# Altium PCB 175-00025,rev1,Extended GPIO Apps Board.PcbDoc
Units mil, origin at the board's own origin, x right, y up, seen from the top; angles counter-clockwise.
Board outline 3307.09 x 1358.27 mil, 3 copper layers (Top Layer (*.GTL), Internal Plane 1 (*.GP1), Bottom Layer (GBL)); 13 components, 36 nets, 170 pads, 13 vias.
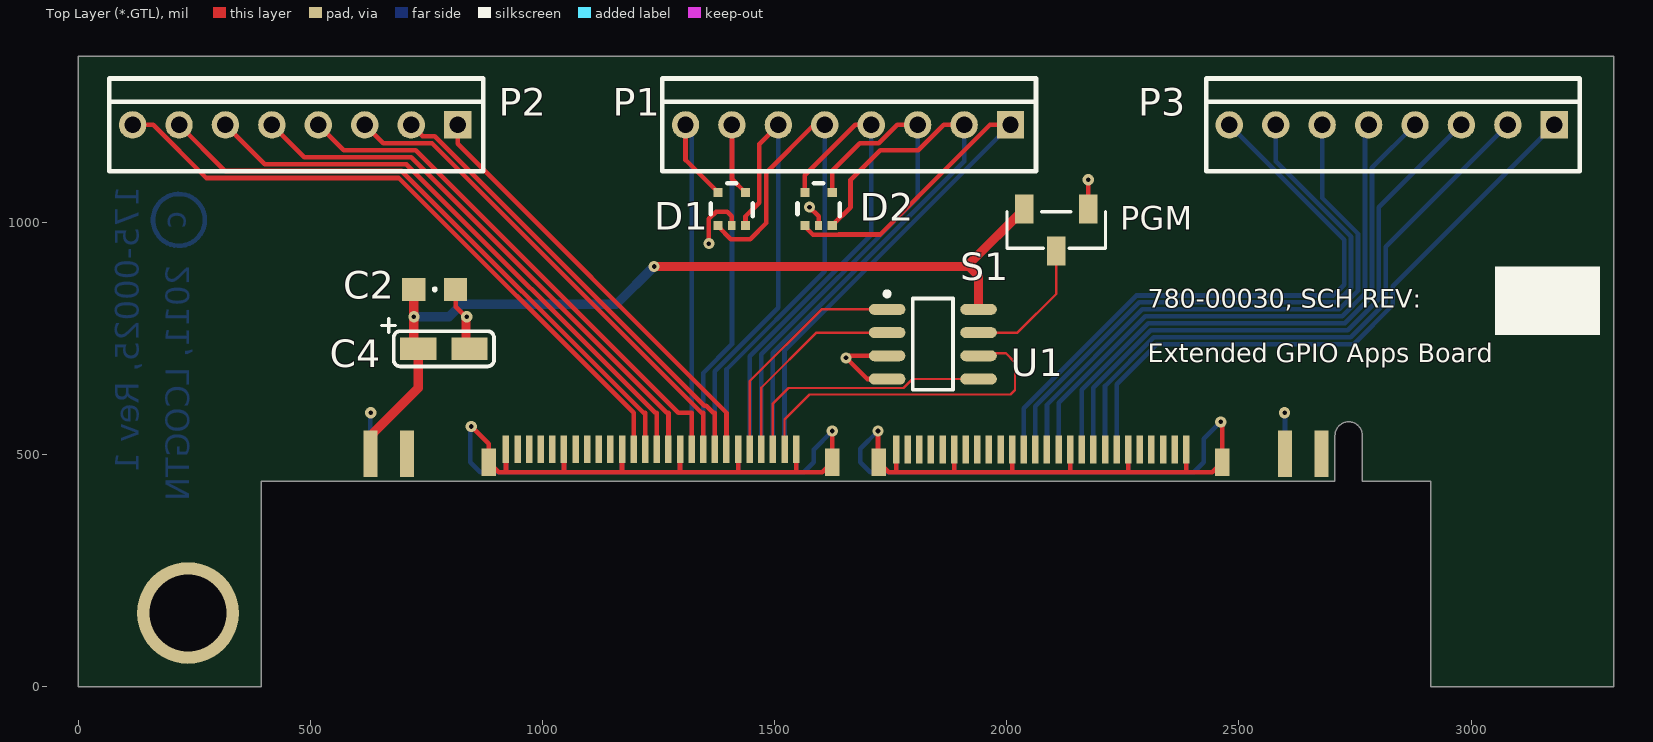
[diagram p0: Top Layer (*.GTL) view]
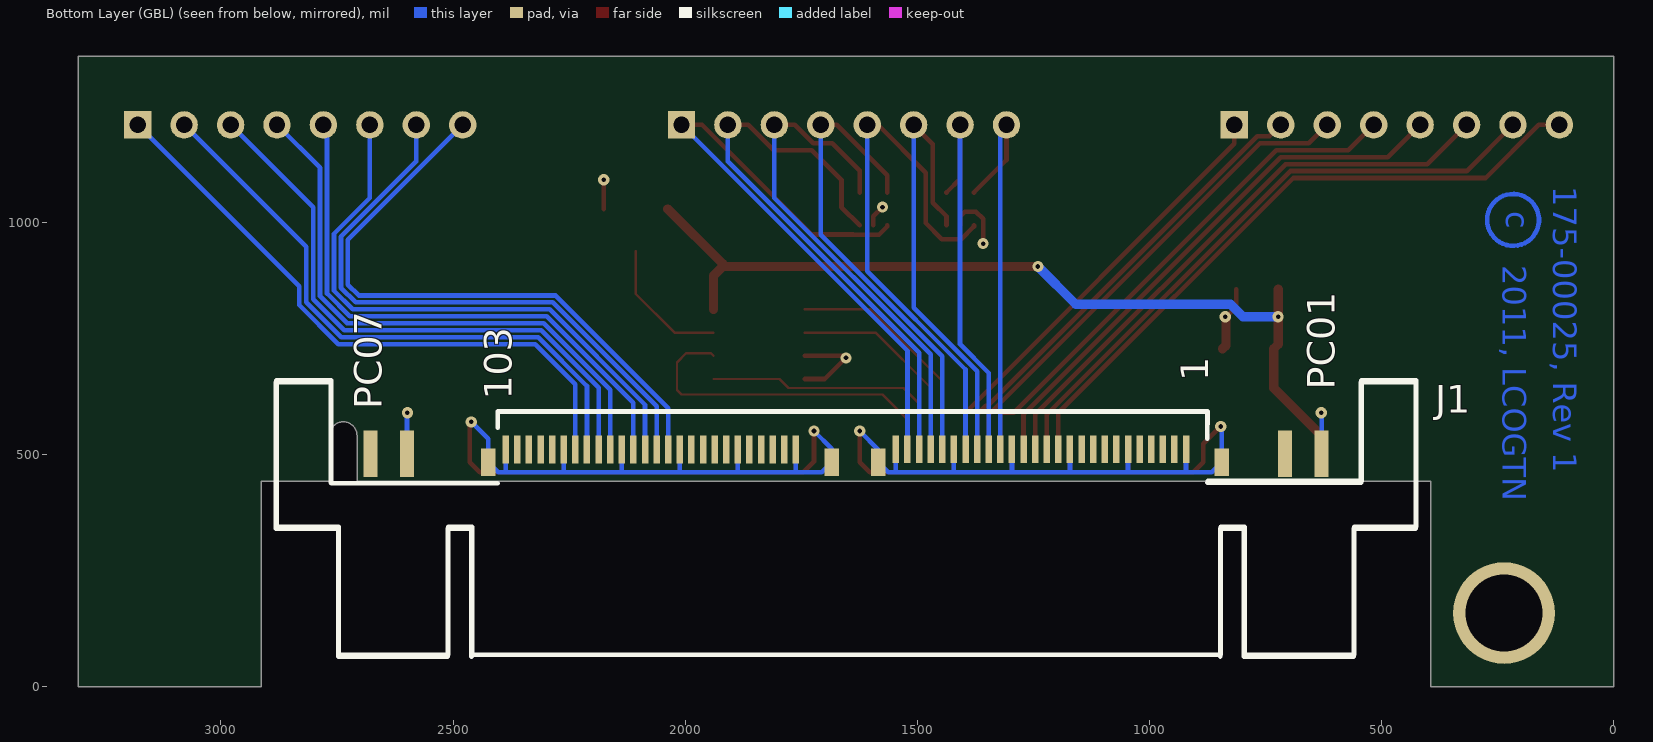
[diagram p1: Bottom Layer (GBL) view, seen from below]
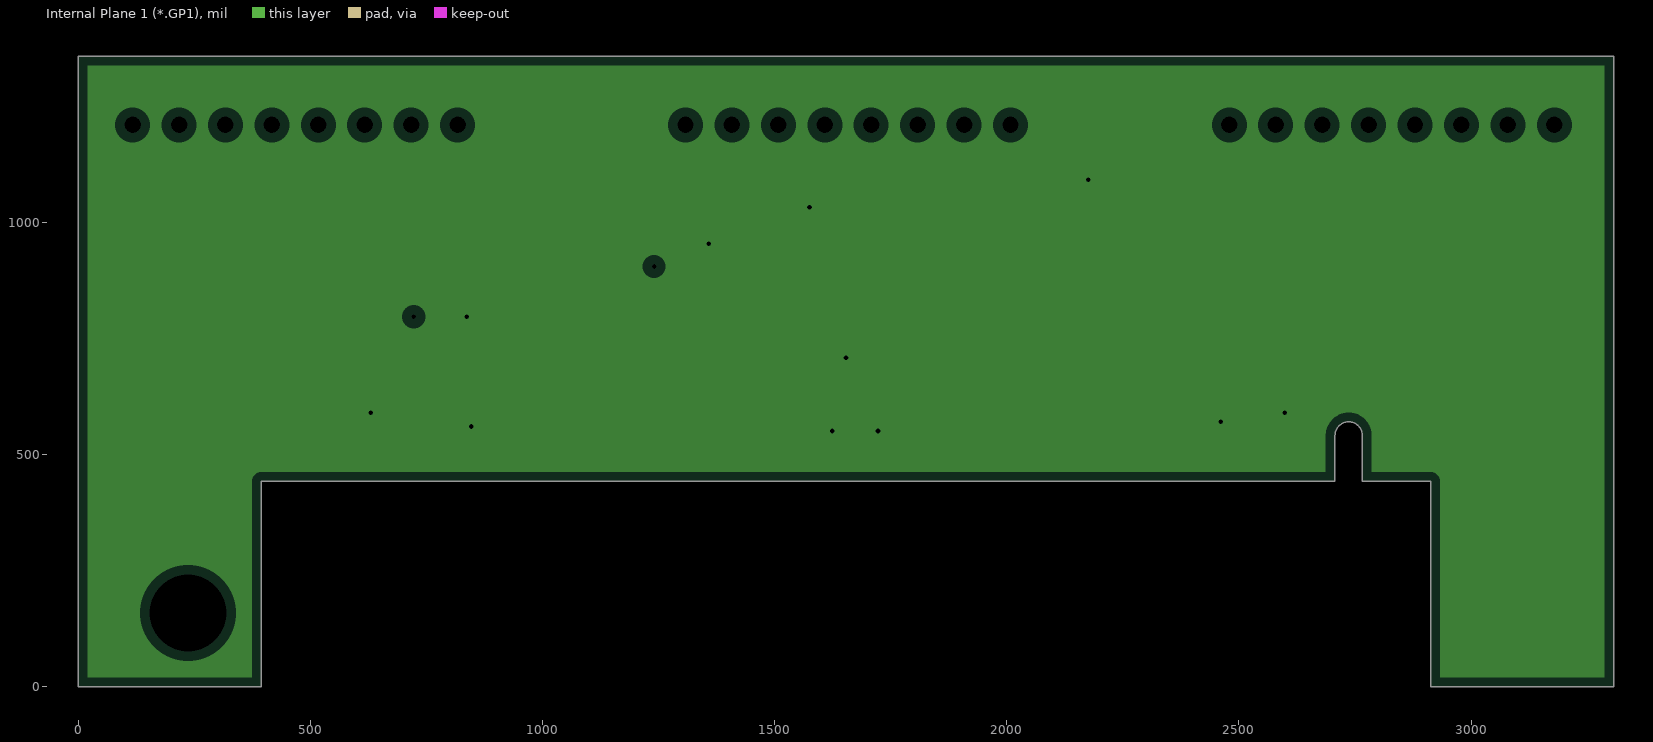
[diagram p2: Internal Plane 1 (*.GP1), clearances drawn from the general rule]

## Layer stack, top to bottom
Top Layer (*.GTL): signal copper 1.4
Dielectric: core 12.6, FR-4, Dk 4.8
Internal Plane 1 (*.GP1): plane copper 1.4, net GND
Dielectric: prepreg 12.6, FR-4, Dk 4.8
Bottom Layer (GBL): signal copper 1.4

## Board outline
0,0 0,442.91 0,1358.27 3307.09,1358.27 3307.09,0 2913.39,0 2913.39,442.91 2765.85,442.91 2765.85,541.34 ccw(c2736.32,541.34) 2706.79,541.34 2706.79,442.91 393.7,442.91 393.7,0

## Design rules (kind name [scope] priority, off if disabled: settings)
Clearance [All] p1: gap=5
ComponentClearance ComponentClearance_1 [(InComponent('J1'))] p1: gap=-393.7 collisioncheckmode=3 verticalgap=-393.7 showdistances=FALSE
ComponentClearance [All] p2: gap=10 collisioncheckmode=3 verticalgap=10 showdistances=FALSE
HoleSize [All] p1: absolutevalues=TRUE maxlimit=250 minlimit=1 maxpercent=80.000 minpercent=20.000
MinimumSolderMaskSliver [All] p1: minsoldermaskwidth=1
PlaneClearance [All] p1: clearance=20
PlaneConnect [All] p1: planeconnectstyle=Relief reliefexpansion=20 reliefentries=4 reliefconductorwidth=10 reliefairgap=10
PolygonConnect [All] p1: connectstyle=Relief reliefconductorwidth=10 reliefentries=4 polygonreliefangle="90 Angle"
RoomDefinition "780-00030,rev1,Pg1,Extended GPIO Apps board" [InComponentClass('780-00030,rev1,Pg1,Extended GPIO Apps board')] p1: confinementstyle=ConfineIn formatcopy=TRUE lockcomponents=FALSE outline -1304.13,-728.35 6606.3,-728.35 6606.3,2976.38 -1304.13,2976.38
RoutingVias [All] p1: holewidth=10 width=24 viastyle="Through Hole" minholewidth=10 minwidth=24 maxholewidth=28 maxwidth=50
SilkToSilkClearance [All] p1: silktosilkclearance=1
SilkscreenOverComponentPads [All] p1: minsilkscreentomaskgap=1
SolderMaskExpansion [All] p1: expansion=4
Width [All] p1: maxlimit=20 minlimit=5 preferedwidth=5
21 further rules are at their usual default settings.

## Classes and differential pairs
component class "780-00030,rev1,Pg1,Extended GPIO Apps board": C2 C4 D1 D2 J1 P1 P2 P3 S1 U1

## Components (designator, comment, footprint, x,y, rotation, side; value= is the part's Value field where it differs from the comment)
C2 "Cap SMD" SMD_0805 767.72,856.3 r0 top
C4 "16V" SMD_CAP_3216 787.4,728.35 r180 top
D1 "PESD3V3L4UG" SOT-353 1377.95,994.09 r90 top
D2 "PESD3V3L4UG" SOT-353 1564.96,994.09 r90 top
Designator13 "Comment" "TARGET MECHANICAL 5" -816.93,2047.24 r0 top
Designator14 "Comment" "TARGET MECHANICAL 5" -767.72,-767.72 r0 top
Designator15 "Comment" "TARGET MECHANICAL 5" 3897.64,1958.66 r0 top
J1 "QMSS-EM-PC4-104pin" "QMS EDGE PWR PINS - 104 pin" 1653.54,442.91 r180 bottom locked
P1 "Header 8" "HDR1X8 for IDC" 2007.87,1210.63 r180 top
P2 "Header 8" "HDR1X8 for IDC" 816.93,1210.63 r180 top
P3 "Header 8" "HDR1X8 for IDC" 3179.13,1210.63 r180 top
S1 "CJS-1200TB" CAS-120A 2106.3,984.25 r180 top
U1 "M24C32RMN1" SOP8_N 1840.55,738.19 r0 top

## Footprints (in the part's own frame and the unit in brackets; to place one, negate y for a bottom-side part, rotate by r counter-clockwise, add the part's x,y. Pads: shape width x height; smd on the part's side, far side on the other; paste and mask are expansions set on the pad)
CAS-120A [mm] "Copal Electronics CAS SMD Slide Switch J-Hook"
  rect 1x1.6 smd: 1(-1.75,-1.15) 2(0,1.15) 3(1.75,-1.15)
  silkscreen extent -2.69,-1 2.69,1
"HDR1X8 for IDC" [mm] "Connector; Header; 8 Position"
  rect 1.5x1.5 hole 0.9: 1(0,0)
  round 1.5 hole 0.9: 2(2.54,0) 3(5.08,0) 4(7.62,0) 5(10.16,0) 6(12.7,0) 7(15.24,0) 8(17.78,0)
  silkscreen extent -1.4,-2.54 19.05,2.54
"QMS EDGE PWR PINS - 104 pin" [mil] "52 pos (104 pin) + 8 pwr pins"
  rect 14x60 smd: 1(732.45,69.15) 3(707.45,69.15) 5(682.45,69.15) 7(657.45,69.15) 9(632.45,69.15) 11(607.45,69.15) 13(582.45,69.15) 15(557.45,69.15) 17(532.45,69.15) 19(507.45,69.15) 21(482.45,69.15) 23(457.45,69.15) 25(432.45,69.15) 27(407.45,69.15) 29(382.45,69.15) 31(357.45,69.15) 33(332.45,69.15) 35(307.45,69.15) 37(282.45,69.15) 39(257.45,69.15) 41(232.45,69.15) 43(207.45,69.15) 45(182.45,69.15) 47(157.45,69.15) 49(132.45,69.15) 51(107.45,69.15) 53(-107.89,68.09) 55(-132.89,68.09) 57(-157.89,68.09) 59(-182.89,68.09) 61(-207.89,68.09) 63(-232.89,68.09) 65(-257.89,68.09) 67(-282.89,68.09) 69(-307.89,68.09) 71(-332.89,68.09) 73(-357.89,68.09) 75(-382.89,68.09) 77(-407.89,68.09) 79(-432.89,68.09) 81(-457.89,68.09) 83(-482.89,68.09) 85(-507.89,68.09) 87(-532.89,68.09) 89(-557.89,68.09) 91(-582.89,68.09) 93(-607.89,68.09) 95(-632.89,68.09) 97(-657.89,68.09) 99(-682.89,68.09) 101(-707.89,68.09) 103(-732.89,68.09)
  rect 14x60 smd far side: 2(732.45,69.15) 4(707.45,69.15) 6(682.45,69.15) 8(657.45,69.15) 10(632.45,69.15) 12(607.45,69.15) 14(582.45,69.15) 16(557.45,69.15) 18(532.45,69.15) 20(507.45,69.15) 22(482.45,69.15) 24(457.45,69.15) 26(432.45,69.15) 28(407.45,69.15) 30(382.45,69.15) 32(357.45,69.15) 34(332.45,69.15) 36(307.45,69.15) 38(282.45,69.15) 40(257.45,69.15) 42(232.45,69.15) 44(207.45,69.15) 46(182.45,69.15) 48(157.45,69.15) 50(132.45,69.15) 52(107.45,69.15) 54(-107.89,68.09) 56(-132.89,68.09) 58(-157.89,68.09) 60(-182.89,68.09) 62(-207.89,68.09) 64(-232.89,68.09) 66(-257.89,68.09) 68(-282.89,68.09) 70(-307.89,68.09) 72(-332.89,68.09) 74(-357.89,68.09) 76(-382.89,68.09) 78(-407.89,68.09) 80(-432.89,68.09) 82(-457.89,68.09) 84(-482.89,68.09) 86(-507.89,68.09) 88(-532.89,68.09) 90(-557.89,68.09) 92(-582.89,68.09) 94(-607.89,68.09) 96(-632.89,68.09) 98(-657.89,68.09) 100(-682.89,68.09) 102(-707.89,68.09) 104(-732.89,68.09)
  rect 31x60 smd: 105(809.45,41.09) 107(69.45,41.09) 109(-30.55,41.09) 111(-770.55,41.09)
  rect 31x60 smd far side: 106(769.45,41.09) 108(29.45,41.09) 110(-70.55,41.09) 112(-810.55,41.09)
  rect 30x100 smd: PC01(1024.45,59.65) PC03(945.55,59.65) PC05(-945.55,59.15) PC07(-1024.45,59.15)
  rect 30x100 smd far side: PC02(1024.45,59.65) PC04(945.55,59.65) PC06(-945.55,59.15) PC08(-1024.45,59.15)
  silkscreen extent -1228,-377 1229,217
SMD_0805 [mil]
  rect 50x50 smd: 1(-45,0) 2(45,0)
  silkscreen extent -1,-1 1,1
SMD_CAP_3216 [mil]
  rect 78x48 smd: 1(55,0) 2(-55,0)
  silkscreen extent -108,-65 134,38
SOP8_N [mm] "SOIC, 8-Leads, Body 4.9x3.9mm, Pitch 1.27mm, IPC Medium Density"
  oval 2x0.6 smd: 1(-2.5,1.905) 2(-2.5,0.635) 3(-2.5,-0.635) 4(-2.5,-1.905) 5(2.5,-1.905) 6(2.5,-0.635) 7(2.5,0.635) 8(2.5,1.905)
  silkscreen extent -2.62,-2.5 1.1,2.88, body extent -2,-2.5 2,2.5, height 1.75
SOT-353 [mm]
  rect 0.5x0.5 smd: 1(0,0) 3(0,-1.5) 4(1.8,-1.5) 5(1.8,0)
  rect 0.5x0.4 smd: 2(0,-0.75)
  silkscreen extent 0.5,-1.9 2.3,0.4
"TARGET MECHANICAL 5" [mil]

## Part data
C2: "Capacitor"
C4: library part "Cap Tant 16V", "outline 3.2mm x 1.6mm"
D1 D2: library part "ESD Diode 3.3V Quad", "Quad ESD Diode 3.3V"
J1: "SAMTEC QMSS EDGE W/PWR PINS"
P1 P2 P3: "Header, 8-Pin"
S1: library part SW_SPDT_DOUG
U1: "32 Kbit Serial I²C Bus EEPROM"

## Free pads (board coordinates)
  round 218.9 hole 166.14: 0(236.22,159.06)

## Via types
v1: diameter 24, hole 10, Top Layer (*.GTL) to Bottom Layer (GBL), 13 vias

## Nets (pads, with @x,y where several pads share a name; then routed paths per layer and width w, separated by ;. In a path a pad name is that pad's centre, name@x,y a point inside that pad or via, vN(x,y) a via of type N, cw(c..) or ccw(c..) an arc to the next point about the centre after c; other vN are vias at no path point)
+3.3V: C2.1 C4.1 J1.PC02 S1.3 U1.8 | length 1915.4
  Top Layer (*.GTL) w20: J1.PC02 629.09,540.51 732.4,643.82 C4.1 722.72,738.03 v1(722.72,797.24) C2.1 ; v1(1240.16,905.51) 1919.29,905.51 ; U1.8 1938.98,885.83 1919.29,905.51 ; S1.3 1919.29,911.42 1919.29,905.51
  Bottom Layer (GBL) w20: v1(722.72,797.24) 798.43,797.24 825.43,824.24 1158.89,824.24 v1(1240.16,905.51)
+5V: J1.PC04
+12V: J1.PC06
+24V: J1.PC07
+48V: J1.PC03
-12V: J1.PC08
GND: C2.2 C4.2 D1.2 D2.2 J1.1 J1.2 J1.11 J1.12 J1.21 J1.22 J1.31 J1.32 J1.41 J1.42 J1.51 J1.52 J1.53 J1.54 J1.63 J1.64 J1.73 J1.74 J1.83 J1.84 J1.93 J1.94 J1.103 J1.104 J1.105 J1.106 J1.107 J1.108 J1.109 J1.110 J1.111 J1.112 J1.PC01 J1.PC05 S1.1 U1.3 U1.4 | length 5623.4
  Top Layer (*.GTL) w10: C2.2 812.72,818.4 v1@835.24,795.87 ; v1(846.46,561.02) 884.09,523.39 J1.106 905.51,462.6 1545.28,462.6 ; 921.09,463.42 J1.2 ; 1046.09,463.42 J1.12 ; 1171.09,463.42 J1.22 ; 1296.09,463.42 J1.32 ; v1(1358.27,954.72) 1358.11,954.88 1358.11,1008.08 1373.65,1023.62 1397.64,1023.62 1407.48,1013.78 D1.2 ; 1421.09,463.42 J1.42 ; J1.52 1546.09,463.42 1545.28,462.6 ; v1(1574.8,1033.46) 1594.49,1013.78 D2.2 ; v1(1624.02,551.18) v1(1624.02,551.18) J1.108 1602.69,462.6 1545.28,462.6 ; v1(1722.44,551.18) 1722.44,485.65 J1.110 1745.74,462.36 1761.44,462.36 ; U1.4 1699.02,663.19 v1(1653.54,708.66) 1658.07,713.19 U1.3 ; J1.54 1761.44,462.36 ; J1.64 1886.44,462.36 ; J1.74 2011.44,462.36 ; J1.84 2136.44,462.36 ; S1.1 v1(2175.2,1092.52) ; J1.94 2261.44,462.36 ; J1.104 2386.44,462.36 ; v1(2460.63,570.87) 2464.09,567.4 J1.112 2442.45,462.36 2386.44,462.36 ; 1761.44,462.36 1886.44,462.36 ; 1886.44,462.36 2011.44,462.36 ; 2011.44,462.36 2136.44,462.36 ; 2136.44,462.36 2261.44,462.36 ; 2261.44,462.36 2386.44,462.36
  Top Layer (*.GTL) w20: v1(836.61,797.24) 835.24,795.87 835.24,735.5 C4.2
  Bottom Layer (GBL) w10: J1.PC01 629.09,589.72 v1(629.92,590.55) ; v1(846.46,561.02) 844.09,558.66 J1.105 865.5,462.6 1562.69,462.6 J1.107 1584.09,511.26 v1(1624.02,551.18) ; 921.09,463.42 J1.1 ; 1046.09,463.42 J1.11 ; 1171.09,463.42 J1.21 ; 1296.09,463.42 J1.31 ; 1421.09,463.42 J1.41 ; 1546.09,463.42 J1.51 ; v1(1722.44,551.18) 1684.09,512.83 J1.109 1705.74,462.36 2386.44,462.36 ; 1761.44,462.36 J1.53 ; 1886.44,462.36 J1.63 ; 2011.44,462.36 J1.73 ; 2136.44,462.36 J1.83 ; 2261.44,462.36 J1.93 ; J1.103 2386.44,462.36 ; v1(2460.63,570.87) 2424.09,534.33 J1.111 2402.45,462.36 2386.44,462.36 ; v1(2598.43,590.55) 2599.09,589.88 J1.PC05
GP_I/OSPARE0: D1.5 J1.33 P1.8 | length 878.7
  Top Layer (*.GTL) w10: P1.8 1307.87,1135.04 D1.5
  Bottom Layer (GBL) w10: P1.8 1321.09,1197.41 J1.33
GP_I/OSPARE1: D1.4 J1.35 P1.7 | length 881.9
  Top Layer (*.GTL) w10: P1.7 1407.87,1094.09 D1.4
  Bottom Layer (GBL) w10: J1.35 1346.09,676.13 1407.87,737.91 P1.7
GP_I/OSPARE2: D1.3 J1.37 P1.6 | length 1001.1
  Top Layer (*.GTL) w10: D1.3 1437.01,1013.78 1466.54,1043.31 1466.54,1169.29 P1.6
  Bottom Layer (GBL) w10: J1.37 1371.09,679.92 1507.87,816.7 P1.6
GP_I/OSPARE3: D1.1 J1.39 P1.5 | length 1195.2
  Top Layer (*.GTL) w10: D1.1 1377.95,991.76 1405.15,964.57 1446.85,964.57 1481.54,999.25 1481.54,1107.52 1584.65,1210.63 P1.5
  Bottom Layer (GBL) w10: J1.39 1396.09,683.7 1607.87,895.48 P1.5
GP_I/OSPARE4: D2.5 J1.43 P1.4 | length 1032.2
  Top Layer (*.GTL) w10: D2.5 1564.96,1102.36 1673.23,1210.63 P1.4
  Bottom Layer (GBL) w10: J1.43 1446.09,712.49 1707.87,974.27 P1.4
GP_I/OSPARE5: D2.4 J1.45 P1.3 | length 1109.9
  Top Layer (*.GTL) w10: D2.4 1624.02,1112.2 1682.91,1171.1 1724.25,1171.1 1763.77,1210.63 P1.3
  Bottom Layer (GBL) w10: J1.45 1471.09,716.28 1807.87,1053.06 P1.3
GP_I/OSPARE6: D2.3 J1.47 P1.2 | length 1277.3
  Top Layer (*.GTL) w10: D2.3 1663.39,1033.46 1663.39,1092.52 1726.97,1156.1 1809.25,1156.1 1863.77,1210.63 P1.2
  Bottom Layer (GBL) w10: J1.47 1496.09,720.06 1907.87,1131.84 P1.2
GP_I/OSPARE7: D2.1 J1.49 P1.1 | length 1450.6
  Top Layer (*.GTL) w10: D2.1 1564.96,991.76 1582.47,974.25 1638,974.25 1638.16,974.41 1727.55,974.41 1963.77,1210.63 P1.1
  Bottom Layer (GBL) w10: J1.49 1521.09,723.85 P1.1
GP_OUT_D8: J1.75 P3.8 | length 1336.2
  Bottom Layer (GBL) w10: J1.75 2036.44,600.28 2279.34,843.19 2703.43,843.19 2726.38,866.14 2726.38,963.39 P3.8
GP_OUT_D9: J1.77 P3.7 | length 1296.9
  Bottom Layer (GBL) w10: J1.77 2061.44,604.07 2285.56,828.19 2709.64,828.19 2741.38,859.93 2741.38,969.6 2579.13,1131.84 P3.7
GP_OUT_D10: J1.79 P3.6 | length 1257.5
  Bottom Layer (GBL) w10: J1.79 2086.44,607.86 2291.77,813.19 2715.85,813.19 2756.38,853.72 2756.38,975.81 2679.13,1053.06 P3.6
GP_OUT_D11: J1.81 P3.5 | length 1224.6
  Bottom Layer (GBL) w10: J1.81 2111.44,611.64 2297.98,798.19 2722.06,798.19 2771.38,847.5 2771.38,1202.87 P3.5
GP_OUT_D12: J1.85 P3.4 | length 1245.3
  Bottom Layer (GBL) w10: J1.85 2161.44,640.43 2304.2,783.19 2728.28,783.19 2786.38,841.29 2786.38,1117.87 P3.4
GP_OUT_D13: J1.87 P3.3 | length 1276.4
  Bottom Layer (GBL) w10: J1.87 2186.44,644.22 2310.41,768.19 2734.49,768.19 2801.38,835.08 2801.38,1032.87 P3.3
GP_OUT_D14: J1.89 P3.2 | length 1307.5
  Bottom Layer (GBL) w10: J1.89 2211.44,648 2316.62,753.19 2740.7,753.19 2816.38,828.86 2816.38,947.87 P3.2
GP_OUT_D15: J1.91 P3.1 | length 1338.5
  Bottom Layer (GBL) w10: J1.91 2236.44,651.79 2322.83,738.19 2746.92,738.19 2831.38,822.65 2831.38,862.87 P3.1
I2C_SCL: J1.50 U1.6 | length 735.2
  Top Layer (*.GTL) w5: J1.50 1521.09,576.21 1574.8,629.92 2007.87,629.92 2017.72,639.76 2017.72,698.82 1998.03,718.5 1944.29,718.5 U1.6
I2C_SDA: J1.48 U1.5 | length 563
  Top Layer (*.GTL) w5: J1.48 1496.09,610.27 1529.7,643.88 1777.68,643.88 1796.99,663.19 U1.5
NetS1_2: S1.2 U1.7 | length 294.3
  Top Layer (*.GTL) w5: U1.7 2023.03,763.19 2106.3,846.46 S1.2
OPTO_OUT_C0: J1.24 P2.8 | length 1414.5
  Top Layer (*.GTL) w10: P2.8 161.03,1210.63 275.56,1096.1 690.54,1096.1 1196.09,590.55 J1.24
OPTO_OUT_C1: J1.28 P2.6 | length 1264.5
  Top Layer (*.GTL) w10: P2.6 401.46,1126.1 706.76,1126.1 1242.31,590.55 1246.09,590.55 J1.28
OPTO_OUT_C2: J1.34 P2.4 | length 1139.5
  Top Layer (*.GTL) w10: P2.4 571.46,1156.1 726.76,1156.1 1292.31,590.55 1321.09,590.55 J1.34
OPTO_OUT_C3: J1.38 P2.2 | length 989.5
  Top Layer (*.GTL) w10: P2.2 741.46,1186.1 767.97,1186.1 1348.52,605.55 1352.31,605.55 1367.31,590.55 1371.09,590.55 J1.38
OPTO_OUT_E0: J1.26 P2.7 | length 1339.5
  Top Layer (*.GTL) w10: P2.7 316.46,1111.1 696.76,1111.1 1217.31,590.55 1221.09,590.55 J1.26
OPTO_OUT_E1: J1.30 P2.5 | length 1189.5
  Top Layer (*.GTL) w10: P2.5 486.46,1141.1 716.76,1141.1 1267.31,590.55 1271.09,590.55 J1.30
OPTO_OUT_E2: J1.36 P2.3 | length 1064.5
  Top Layer (*.GTL) w10: P2.3 656.46,1171.1 761.76,1171.1 1342.31,590.55 1346.09,590.55 J1.36
OPTO_OUT_E3: J1.40 P2.1 | length 938.5
  Top Layer (*.GTL) w10: P2.1 816.93,1169.72 1396.09,590.55 J1.40
SLOT_ID0: J1.44 U1.1 | length 506.7
  Top Layer (*.GTL) w5: J1.44 1446.09,658.69 1600.59,813.19 U1.1
SLOT_ID1: J1.46 U1.2 | length 452.5
  Top Layer (*.GTL) w5: J1.46 1471.09,644.32 1589.96,763.19 U1.2
pads on no net: J1.3 J1.4 J1.5 J1.6 J1.7 J1.8 J1.9 J1.10 J1.13 J1.14 J1.15 J1.16 J1.17 J1.18 J1.19 J1.20 J1.23 J1.25 J1.27 J1.29 J1.55 J1.56 J1.57 J1.58 J1.59 J1.60 J1.61 J1.62 J1.65 J1.66 J1.67 J1.68 J1.69 J1.70 J1.71 J1.72 J1.76 J1.78 J1.80 J1.82 J1.86 J1.88 J1.90 J1.92 J1.95 J1.96 J1.97 J1.98 J1.99 J1.100 J1.101 J1.102
copper on no net: | length 351.4
  Bottom Layer (GBL) w10: 272.64,1005.91 ccw(c216.71,1005.91) 272.64,1005.91

## Polygon pours and split planes (outlines as drawn)
GND on Internal Plane 1 (*.GP1) (split plane): 3286.99,20.1 2933.48,20.1 2933.48,442.91 2933.1,446.83 2931.95,450.6 2930.1,454.08 2927.6,457.12 2924.55,459.62 2921.08,461.48 2917.31,462.62 2913.39,463.01 2785.95,463.01 2785.95,541.34 2785.9,541.78 2785.62,546.89 2784.68,552.38 2783.14,557.72 2781.01,562.86 2778.32,567.73 2775.1,572.27 2771.4,576.42 2767.25,580.12 2762.71,583.34 2757.84,586.03 2752.71,588.16 2747.36,589.7 2741.88,590.63 2736.32,590.94 2730.77,590.63 2725.28,589.7 2719.94,588.16 2714.8,586.03 2709.93,583.34 2705.39,580.12 2701.24,576.42 2697.54,572.27 2694.32,567.73 2691.63,562.86 2689.5,557.72 2687.96,552.38 2687.03,546.89 2686.74,541.78 2686.7,541.34 2686.7,463.01 393.7,463.01 389.78,462.62 386.01,461.48 382.54,459.62 379.49,457.12 376.99,454.08 375.13,450.6 373.99,446.83 373.6,442.91 373.6,20.1 20.1,20.1 20.1,442.91 20.1,1338.17 3286.99,1338.17

## Other copper
Top Layer (*.GTL):
  text "*.GTL - TOP LAYER GERBER DATA" at 286.34,-1797.05 h80
Bottom Layer (GBL):
  text "175-00025, Rev 1" at 129.92,1078.74 h50 r90
  text "c" at 231.3,1024.61 h50 r90
  text "2011, LCOGTN" at 239.17,908.46 h50 r90
  text "*.GBL - BOTTOM LAYER GERBER DATA" at 286.34,-1797.05 h80
Internal Plane 1 (*.GP1) (plane layer: these items are gaps in the copper):
  text "*.GP1 - INTERNAL PLANE LAYER 1 GERBER DATA" at 286.34,-1797.05 h80

## Silkscreen, mask and mechanical layers (free items; w line width, h text height)
Top Overlay:
  rectangle: 3051.18,757.87 3277.56,905.51
  text "PGM" at 2244.09,984.25 h50
  text "780-00030, SCH REV:" at 2303.15,816.93 h40
  text "Extended GPIO Apps Board" at 2303.15,698.82 h40
  text "*.GTO - TOP OVERLAY GERBER DATA" at 286.34,-1797.05 h80
Bottom Overlay:
  text "*GBO -- BOTTOM OVERLAY GERBER DATA" at 286.34,-1797.05 h80
Top Paste:
  text "*.GTP - TOP-SIDE SOLDER PASTE MASK" at 286.33,-1797.04 h80
Bottom Paste:
  text "*.GBP - BOTTOM-SIDE SOLDER PASTE MASK" at 286.33,-1797.04 h80
Top Solder:
  text "*.GTS - TOP SOLDER MASK GERBER DATA" at 286.34,-1797.05 h80
Bottom Solder:
  rectangle: 33.46,298.23 292.32,1101.38
  text "*.GBS - BOTTOM SOLDER MASK GERBER DATA" at 286.34,-1797.05 h80
Mechanical 1:
  lines w39.37: 2706.79,442.91 1653.54,442.91 393.7,442.91 393.7,0 0,0 0,442.91 0,816.93 0,1358.27 3307.09,1358.27 3307.09,659.45 3307.09,364.17 3307.09,0 2913.39,0 2913.39,442.91
Mechanical 2:
  lines w10: -13462.66,-7877.05 -13462.66,8122.95 7537.34,8122.95 7537.34,-7877.05 -13462.66,-7877.05 ; 3482.34,-7771.05 ccw(c3532.34,-7771.05) 3532.34,-7821.05 3862.34,-7821.05 ccw(c3862.34,-7781.05) 3902.34,-7781.05 3902.34,-7611.05 ccw(c3862.34,-7611.05) 3862.34,-7571.05 3482.34,-7571.05 3482.34,-7771.05 ; 3482.34,-7481.05 ccw(c3532.34,-7481.05) 3532.34,-7531.05 7432.34,-7531.05 ccw(c7432.34,-7481.05) 7482.34,-7481.05 7482.34,-7291.05 ccw(c7432.34,-7291.05) 7432.34,-7241.05 3482.34,-7241.05 3482.34,-7481.05 ; 3482.34,-7151.05 ccw(c3532.34,-7151.05) 3532.34,-7201.05 5412.34,-7201.05 ccw(c5412.34,-7151.05) 5462.34,-7151.05 5462.34,-7001.05 ccw(c5412.34,-7001.05) 5412.34,-6951.05 3482.34,-6951.05 3482.34,-7151.05 ; 3482.34,-6871.05 ccw(c3522.34,-6871.05) 3522.34,-6911.05 4332.34,-6911.05 ccw(c4332.34,-6861.05) 4382.34,-6861.05 4382.34,-6711.05 ccw(c4332.34,-6711.05) 4332.34,-6661.05 3482.34,-6661.05 3482.34,-6871.05 ; 3942.34,-7781.05 ccw(c3982.34,-7781.05) 3982.34,-7821.05 5942.34,-7821.05 ccw(c5942.34,-7781.05) 5982.34,-7781.05 5982.34,-7611.05 ccw(c5942.34,-7611.05) 5942.34,-7571.05 3942.34,-7571.05 3942.34,-7781.05 ; 4422.34,-6861.05 ccw(c4472.34,-6861.05) 4472.34,-6911.05 5412.34,-6911.05 ccw(c5412.34,-6861.05) 5462.34,-6861.05 5462.34,-6711.05 ccw(c5412.34,-6711.05) 5412.34,-6661.05 4422.34,-6661.05 4422.34,-6861.05 ; 5502.34,-7151.05 ccw(c5552.34,-7151.05) 5552.34,-7201.05 7432.34,-7201.05 ccw(c7432.34,-7151.05) 7482.34,-7151.05 7482.34,-7001.05 ccw(c7432.34,-7001.05) 7432.34,-6951.05 5502.34,-6951.05 5502.34,-7151.05 ; 5502.34,-6861.05 ccw(c5552.34,-6861.05) 5552.34,-6911.05 6492.34,-6911.05 ccw(c6492.34,-6861.05) 6542.34,-6861.05 6542.34,-6711.05 ccw(c6492.34,-6711.05) 6492.34,-6661.05 5502.34,-6661.05 5502.34,-6861.05 ; 6022.34,-7771.05 ccw(c6072.34,-7771.05) 6072.34,-7821.05 6402.34,-7821.05 ccw(c6402.34,-7781.05) 6442.34,-7781.05 6442.34,-7611.05 ccw(c6402.34,-7611.05) 6402.34,-7571.05 6022.34,-7571.05 6022.34,-7771.05 ; 6482.34,-7781.05 ccw(c6522.34,-7781.05) 6522.34,-7821.05 7432.34,-7821.05 ccw(c7432.34,-7771.05) 7482.34,-7771.05 7482.34,-7621.05 ccw(c7432.34,-7621.05) 7432.34,-7571.05 6482.34,-7571.05 6482.34,-7781.05 ; 6582.34,-6861.05 ccw(c6632.34,-6861.05) 6632.34,-6911.05 7432.34,-6911.05 ccw(c7432.34,-6861.05) 7482.34,-6861.05 7482.34,-6711.05 ccw(c7432.34,-6711.05) 7432.34,-6661.05 6582.34,-6661.05 6582.34,-6861.05
  lines w17: -12842.56,-3861.18 -7574.76,-3861.18 ; -12842.56,-3553.08 -7574.76,-3553.08 ; -12902.56,-5949.23 ccw(c-12803.56,-5949.23) -12803.56,-6048.23 -7613.76,-6048.23 ccw(c-7613.76,-5949.23) -7514.76,-5949.23 -7514.76,-2516.32 ccw(c-7613.76,-2516.32) -7613.76,-2417.32 -12803.56,-2417.32 ccw(c-12803.56,-2516.32) -12902.56,-2516.32 -12902.56,-5949.23
  lines w20: -13442.6,-7231.17 cw(c-13392.66,-7306.05) -13392.66,-7216.05 -12932.66,-7216.05 cw(c-12932.66,-7306.05) -12842.66,-7306.05 -12842.66,-7356.05 ccw(c-12832.66,-7356.05) -12832.66,-7366.05 -10192.66,-7366.05 cw(c-10192.66,-7456.05) -10102.66,-7456.05 -10102.66,-7796.05 cw(c-10192.66,-7796.05) -10117.79,-7845.98 ; 3438.51,-7861.03 cw(c3532.34,-7771.05) 3402.34,-7771.05 3402.34,-6101.05 cw(c3532.34,-6101.05) 3532.34,-5971.05 7432.34,-5971.05 cw(c7432.34,-6101.05) 7521,-6005.97 ; -13442.66,-7796.05 ccw(c-13392.66,-7796.05) -13392.66,-7846.05 -10192.66,-7846.05 ccw(c-10192.66,-7796.05) -10142.66,-7796.05 -10142.66,-7456.05 ccw(c-10192.66,-7456.05) -10192.66,-7406.05 -12832.66,-7406.05 cw(c-12832.66,-7356.05) -12882.66,-7356.05 -12882.66,-7306.05 ccw(c-12932.66,-7306.05) -12932.66,-7256.05 -13392.66,-7256.05 ccw(c-13392.66,-7306.05) -13442.66,-7306.05 -13442.66,-7796.05 ; -5932.66,-7697.05 ccw(c-5802.66,-7697.05) -5802.66,-7827.05 -1062.66,-7827.05 ccw(c-1062.66,-7697.05) -932.66,-7697.05 -932.66,-6107.05 ccw(c-1062.66,-6107.05) -1062.66,-5977.05 -5802.66,-5977.05 ccw(c-5802.66,-6107.05) -5932.66,-6107.05 -5932.66,-7697.05 ; 3442.34,-7771.05 ccw(c3532.34,-7771.05) 3532.34,-7861.05 7432.34,-7861.05 ccw(c7432.34,-7771.05) 7522.34,-7771.05 7522.34,-6101.05 ccw(c7432.34,-6101.05) 7432.34,-6011.05 3532.34,-6011.05 ccw(c3532.34,-6101.05) 3442.34,-6101.05 3442.34,-7771.05
  lines w24: -3382.66,-7667.05 -3232.66,-7667.05 ; -3382.66,-7417.05 -3232.66,-7417.05 ; -3382.66,-7167.05 -3232.66,-7167.05 ; -3382.66,-6917.05 -3232.66,-6917.05 ; -3382.66,-6667.05 -3232.66,-6667.05
  lines w30: -13962.66,-8377.05 -13962.66,8622.95 8037.34,8622.95 8037.34,-8377.05 -13962.66,-8377.05
  lines w50: 3627.34,-6512.05 5277.34,-6512.05 ; 3627.34,-6132.05 5277.34,-6132.05 ; 5277.34,-6512.05 5277.34,-6132.05 ; 5277.34,-6512.05 3617.34,-6512.05 3617.34,-6132.05 5277.34,-6132.05
  text "NOTES (UNLESS OTHERWISE SPECIFIED):" at -13142.66,7598.95 h90
  text "GENERAL" at -13042.66,7398.95 h90
  text "1)" at -12942.66,7198.9 h75
  text "PCB IS 6-LAYER, .062\" THICK." at -12742.66,7198.92 h75
  text "2)" at -12942.66,7048.9 h75
  text "CONSTRUCTION IS SOLDER-MASK-OVER-BARE-COPPER (SMOBC)." at -12742.66,7048.9 h75
  text "3)" at -12942.66,6898.9 h75
  text "ACCEPTABILITY SHALL BE BASED ON IPC-A-600, CLASS 2." at -12742.66,6898.9 h75
  text "4)" at -12942.66,6748.9 h75
  text "THE FOLLOWING GERBER RS274X PHOTO TOOL FILES SHALL BE USED TO DEFINE ALL CIRCUIT FEATURES:" at -12742.66,6748.9 h75
  text "*.GTL - TOP LAYER GERBER DATA" at -12468.66,6537.95 h80
  text "*.GP1 - INTERNAL PLANE LAYER 1 GERBER DATA" at -12468.66,5923.29 h80
  text "*.GBL - BOTTOM LAYER GERBER DATA" at -12468.66,5154.96 h80
  text "*.GTO - TOP OVERLAY GERBER DATA" at -12468.66,5001.29 h80
  text "*.GTS - TOP SOLDER MASK GERBER DATA" at -12468.66,4847.62 h80
  text "*.GTP - TOP-SIDE SOLDER PASTE MASK" at -12468.67,4693.95 h80
  text "*GBO BOTTOM OVERLAY GERBER DATA" at -12468.66,4540.29 h80
  text "*.GBS - BOTTOM SOLDER MASK GERBER DATA" at -12468.66,4386.63 h80
  text "*.GBP - BOTTOM-SIDE SOLDER PASTE MASK" at -12468.67,4232.95 h80
  text "5)" at -13039.66,3517.19 h75
  text "THE PHOTO TOOL SHALL NOT BE COMPENSATED WITHOUT PRIOR ENGINEERING APPROVAL." at -12839.66,3517.19 h75
  text "PCB DESIGNER: RICH LOBDILL   PH (805) 880-1621  FAX (805) 961-1792." at -12839.66,3367.24 h75
  text "FABRICATION TOLERANCES" at -12984.66,3040.95 h90
  text "6)" at -12884.66,2840.9 h75
  text "END PRODUCT CONDUCTOR WIDTHS AND PAD DIAMETERS SHALL NOT VARY MORE THAN" at -12684.66,2840.9 h75
  text "0.002\" FROM THE 1:1 DIMENSIONS OF THE MASTER ARTWORK." at -12684.66,2690.95 h75
  text "7)" at -12884.66,2540.9 h75
  text "THE CONDUCTIVE PATTERN SHALL BE POSITIONED SO THAT THE LOCATION OF ANY PAD OR" at -12684.66,2540.9 h75
  text "LAND SHALL BE WITHIN 0.005\" DIAMETER TO THE TRUE POSITION OF THE HOLE IT CIRCUMSCRIBES." at -12684.66,2390.95 h75
  text "8)" at -12884.66,2240.9 h75
  text "ALL DRILL HOLE SIZES AND TOLERANCES APPLY AFTER PLATING." at -12684.66,2240.9 h75
  text "9)" at -12884.66,2090.9 h75
  text "THE MINIMUM ANNULAR RING SHALL BE 0.005\"." at -12684.66,2090.9 h75
  text "10)" at -12939.66,1940.9 h75
  text "BOW AND TWIST SHALL NOT EXCEED 0.010\" PER INCH." at -12684.66,1940.9 h75
  text "11)" at -12929.66,1790.9 h75
  text "FOR PCB ROUTING DIMENSIONS: .XXX = +/-.005\"  .XX = +/-.020\"" at -12684.66,1790.9 h75
  text "MATERIAL" at -12984.66,1590.95 h90
  text "12)" at -12939.66,1390.9 h75
  text "BASE MATERIAL IS FR4 EPOXY FIBERGLASS" at -12677.66,1384.95 h75
  text "SEE STACK-UP LEGEND FOR COPPER CLADDING CALL OUTS" at -12677.66,1244.95 h75
  text "13)" at -12939.66,1240.9 h75
  text "PLATING" at -12984.66,1040.95 h90
  text "14)" at -12939.66,845.9 h75
  text "ALL HOLES AND CONDUCTIVE SURFACES SHALL BE PLATED WITH A MINIMUM OF 0.001\" COPPER." at -12684.66,845.9 h75
  text "15)" at -12939.66,695.9 h75
  text "AFTER SOLDERMASK, ALL EXPOSED HOLES AND CONDUCTIVE SURFACES SHALL BE COATED" at -12684.66,695.9 h75
  text "WITH A GOLD IMMERSION PLATING TO PRESERVE SOLDERABILITY." at -12677.66,544.95 h75
  text "COATINGS" at -12984.66,345.95 h90
  text "16)" at -12934.66,150.9 h75
  text "THE SOLDERMASK SHALL BE BLACK LIQUID PHOTO-IMAGEABLE PER IPC-SM-840, TYPE-B, CLASS 2." at -12684.66,150.9 h75
  text "17)" at -12939.66,0.9 h75
  text "THE SOLDERMASK REGISTRATION ALLOWANCE IS 0.003\".  THERE SHALL BE NO SOLDERMASK ON" at -12684.66,0.9 h75
  text "ANY SOLDER PAD OR LAND." at -12684.66,-149.1 h75
  text "MARKING" at -12984.66,-349.05 h90
  text "18)" at -12939.66,-544.1 h75
  text "THE LEGEND SHALL BE SCREEN-PRINTED USING PERMANENT YELLOW EPOXY INK." at -12684.66,-544.1 h75
  text "19)" at -12939.66,-694.1 h75
  text "THE SCREEN PRINTING REGISTRATION ALLOWANCE IS 0.007\".  THERE SHALL BE NO INK ON ANY" at -12684.66,-694.1 h75
  text "SOLDER PAD OR LAND." at -12684.66,-844.05 h75
  text "20)" at -12949.66,-994.1 h75
  text "THE VENDOR CODE AND UL FLAMMABILITY RATING MAY BE ETCHED IN THE FOIL OR MARKED IN" at -12684.66,-994.1 h75
  text "PERMANENT EPOXY INK (VENDOR'S OPTION)." at -12684.66,-1144.05 h75
  text "ELECTRICAL TESTING" at -12984.66,-1344.05 h90
  text "21)" at -12939.66,-1539.1 h75
  text "ALL BOARDS SHALL BE ELECTRICALLY TESTED TO THE SUPPLIED IPC-D-356A NET LIST" at -12684.66,-1539.1 h75
  text "FOR CONTINUITY, OPENS AND SHORTS." at -12684.66,-1689.05 h75
  text "Layer Stack Up Detail for: 175-00025,rev1,Extended GPIO Apps Board.PcbDoc" at -12842.56,-3033.5 h71
  text "Layer" at -12842.56,-3668.08 h71
  text "COPPER THICKNESS" at -10069.88,-3759.84 h100
  text "Name" at -12842.56,-3810.08 h71
  text "1/2 oz" at -9744.09,-4184.06 h100
  text "Top Layer (*.GTL)" at -12842.56,-4199.44 h99
  text "1 OZ" at -9668.31,-4841.54 h100
  text "Internal Plane 1 (*.GP1)" at -12842.56,-4858.96 h99
  text "1/2 oz" at -9711.61,-5477.36 h100
  text "Bottom Layer (GBL)" at -12842.56,-5518.47 h99
  text "Las Cumbres Observatory, Inc." at 5447.34,-6152.05 h90
  text "Las Cumbres Observatory" at 3677.34,-6272.05 h150
  text "PRIMARY PCB SPECIFICATIONS" at -5485.66,-6287.05 h200
  text "6740 Cortona Dr." at 5887.34,-6306.05 h90
  text "Global Telescope Network" at 3837.34,-6432.05 h125
  text "Goleta, CA 93117" at 5837.34,-6456.05 h90
  text "(REFER TO COMPLETE SPEC LISTING AT LEFT FOR FURTHER DETAILS)" at -5832.66,-6492.05 h100
  text "www.lcogt.net" at 5977.34,-6602.05 h90
  text "DATE" at 3502.34,-6712.85 h32
  text "DESIGNED" at 4442.34,-6712.85 h32
  text "DRAWN" at 5522.34,-6712.85 h32
  text "SCALE" at 6602.34,-6712.85 h32
  text "NUMBER OF LAYERS" at -5732.66,-6742.05 h150
  text "3" at -2182.66,-6742.06 h150
  text "Rich Lobdill" at 5827.34,-6812.05 h55
  text "Rich Lobdill" at 4702.34,-6817.05 h55
  text "1 : 1" at 6887.34,-6831.05 h90
  text "3/2/2011" at 3532.34,-6838.05 h90
  text "FINISHED THICKNESS" at -5732.66,-6992.05 h150
  text ".062\"" at -2357.66,-6992.05 h150
  text "CHECKED/DATE" at 3502.34,-7002.85 h32
  text "APPROVED/DATE" at 5522.34,-7002.85 h32
  text "BASE MATERIAL" at -5732.66,-7242.05 h150
  text "FR4" at -2432.66,-7242.05 h150
  text "TITLE" at 3502.34,-7292.85 h32
  text "NOTICE" at -13387.66,-7401.05 h100
  text "175-00025, Extended GPIO Apps Board" at 3722.34,-7437.05 h100
  text "GOLD IMMERSION" at -2926.66,-7459.05 h150
  text "PLATING TYPE" at -5732.66,-7492.05 h150
  text "THIS DRAWING EMBODIES A PROPRIETARY DESIGN OWNED BY LAS CUMBRES" at -13352.66,-7516.05 h60
  text "OBSERVATORY.  IT IS SUBMITTED FOR A SPECIFIC PURPOSE UNDER A CON-" at -13352.66,-7616.05 h60
  text "SIZE" at 3502.34,-7622.85 h32
  text "DOC NO." at 3962.34,-7622.85 h32
  text "REV" at 6042.34,-7622.85 h32
  text "SHEET" at 6502.34,-7622.85 h32
  text "FIDENTIAL RELATIONSHIP, AND EXCEPT FOR PURPOSES EXPRESSLY GRANTED" at -13352.66,-7711.05 h60
  text "OF" at 6932.34,-7726.05 h60
  text "SOLDER MASK COLOR" at -5732.66,-7742.05 h150
  text "BLACK" at -2307.66,-7742.05 h150
  text "1" at 6762.34,-7746.05 h100
  text "X" at 7162.34,-7746.05 h100
  text "1" at 6187.34,-7759.05 h130
  text "-" at 4517.34,-7761.05 h130
  text "GPT" at 5237.06,-7775.84 h130
  text "C" at 3637.34,-7777.05 h100
  text "IN WRITING, ALL RIGHTS ARE RESERVED BY LAS CUMBRES OBSERVATORY." at -13352.66,-7801.05 h60
Mechanical 5:
  text "175-00025_Rev1, Extended GPIO Apps Brd" at 307.37,-1366.46 h80
  text "LAS CUMBRES OBSERVATORY     3/4/2011" at 307.37,-1516.48 h80
Drill Drawing:
  lines w10: -13462.66,-7877.05 -13462.66,8122.95 7537.34,8122.95 7537.34,-7877.05 -13462.66,-7877.05 ; 3482.34,-7771.05 ccw(c3532.34,-7771.05) 3532.34,-7821.05 3862.34,-7821.05 ccw(c3862.34,-7781.05) 3902.34,-7781.05 3902.34,-7611.05 ccw(c3862.34,-7611.05) 3862.34,-7571.05 3482.34,-7571.05 3482.34,-7771.05 ; 3482.34,-7481.05 ccw(c3532.34,-7481.05) 3532.34,-7531.05 7432.34,-7531.05 ccw(c7432.34,-7481.05) 7482.34,-7481.05 7482.34,-7291.05 ccw(c7432.34,-7291.05) 7432.34,-7241.05 3482.34,-7241.05 3482.34,-7481.05 ; 3482.34,-7161.05 ccw(c3522.34,-7161.05) 3522.34,-7201.05 4942.34,-7201.05 ccw(c4942.34,-7151.05) 4992.34,-7151.05 4992.34,-7001.05 ccw(c4942.34,-7001.05) 4942.34,-6951.05 3482.34,-6951.05 3482.34,-7161.05 ; 3942.34,-7781.05 ccw(c3982.34,-7781.05) 3982.34,-7821.05 5942.34,-7821.05 ccw(c5942.34,-7781.05) 5982.34,-7781.05 5982.34,-7611.05 ccw(c5942.34,-7611.05) 5942.34,-7571.05 3942.34,-7571.05 3942.34,-7781.05 ; 5032.34,-7151.05 ccw(c5082.34,-7151.05) 5082.34,-7201.05 6492.34,-7201.05 ccw(c6492.34,-7151.05) 6542.34,-7151.05 6542.34,-7001.05 ccw(c6492.34,-7001.05) 6492.34,-6951.05 5032.34,-6951.05 5032.34,-7151.05 ; 6022.34,-7771.05 ccw(c6072.34,-7771.05) 6072.34,-7821.05 6402.34,-7821.05 ccw(c6402.34,-7781.05) 6442.34,-7781.05 6442.34,-7611.05 ccw(c6402.34,-7611.05) 6402.34,-7571.05 6022.34,-7571.05 6022.34,-7771.05 ; 6482.34,-7781.05 ccw(c6522.34,-7781.05) 6522.34,-7821.05 7432.34,-7821.05 ccw(c7432.34,-7771.05) 7482.34,-7771.05 7482.34,-7621.05 ccw(c7432.34,-7621.05) 7432.34,-7571.05 6482.34,-7571.05 6482.34,-7781.05 ; 6582.34,-7151.05 ccw(c6632.34,-7151.05) 6632.34,-7201.05 7432.34,-7201.05 ccw(c7432.34,-7151.05) 7482.34,-7151.05 7482.34,-7001.05 ccw(c7432.34,-7001.05) 7432.34,-6951.05 6582.34,-6951.05 6582.34,-7151.05
  lines w20: -13437.6,-7246.17 cw(c-13387.66,-7321.05) -13387.66,-7231.05 -12927.66,-7231.05 cw(c-12927.66,-7321.05) -12837.66,-7321.05 -12837.66,-7371.05 ccw(c-12827.66,-7371.05) -12827.66,-7381.05 -10187.66,-7381.05 cw(c-10187.66,-7471.05) -10097.66,-7471.05 -10097.66,-7811.05 cw(c-10187.66,-7811.05) -10112.79,-7860.98 ; 3437.26,-7859.71 cw(c3532.34,-7771.05) 3402.34,-7771.05 3402.34,-6951.05 cw(c3482.34,-6951.05) 3482.34,-6871.05 7432.34,-6871.05 cw(c7432.34,-7001.05) 7521,-6905.97 ; -13437.66,-7811.05 ccw(c-13387.66,-7811.05) -13387.66,-7861.05 -10187.66,-7861.05 ccw(c-10187.66,-7811.05) -10137.66,-7811.05 -10137.66,-7471.05 ccw(c-10187.66,-7471.05) -10187.66,-7421.05 -12827.66,-7421.05 cw(c-12827.66,-7371.05) -12877.66,-7371.05 -12877.66,-7321.05 ccw(c-12927.66,-7321.05) -12927.66,-7271.05 -13387.66,-7271.05 ccw(c-13387.66,-7321.05) -13437.66,-7321.05 -13437.66,-7811.05 ; 3442.34,-7771.05 ccw(c3532.34,-7771.05) 3532.34,-7861.05 7432.34,-7861.05 ccw(c7432.34,-7771.05) 7522.34,-7771.05 7522.34,-7001.05 ccw(c7432.34,-7001.05) 7432.34,-6911.05 3482.34,-6911.05 ccw(c3482.34,-6951.05) 3442.34,-6951.05 3442.34,-7771.05
  lines w30: -13962.66,-8377.05 -13962.66,8622.95 8037.34,8622.95 8037.34,-8377.05 -13962.66,-8377.05
  text ".Legend" at -2988.66,-3760.05 h100
  text "DESIGNED" at 3502.34,-7002.85 h32
  text "DRAWN" at 5052.34,-7002.85 h32
  text "SCALE" at 6602.34,-7002.85 h32
  text "Rich Lobdill" at 3988.34,-7099.05 h55
  text "Rich Lobdill" at 5549.34,-7101.05 h55
  text "1 : 1" at 6887.34,-7121.05 h90
  text "TITLE" at 3502.34,-7292.85 h32
  text "NOTICE" at -13382.66,-7416.05 h100
  text "175-00025, Extended GPIO Apps Board" at 3719.34,-7437.05 h100
  text "THIS DRAWING EMBODIES A PROPRIETARY DESIGN OWNED BY LAS CUMBRES" at -13347.66,-7531.05 h60
  text "SIZE" at 3502.34,-7622.85 h32
  text "DOC NO." at 3962.34,-7622.85 h32
  text "REV" at 6042.34,-7622.85 h32
  text "SHEET" at 6502.34,-7622.85 h32
  text "OBSERVATORY.  IT IS SUBMITTED FOR A SPECIFIC PURPOSE UNDER A CON-" at -13347.66,-7631.05 h60
  text "FIDENTIAL RELATIONSHIP, AND EXCEPT FOR PURPOSES EXPRESSLY GRANTED" at -13347.66,-7726.05 h60
  text "OF" at 6932.34,-7726.05 h60
  text "2" at 6747.34,-7746.05 h100
  text "X" at 7162.34,-7746.05 h100
  text "-" at 4517.34,-7761.05 h130
  text "1" at 6182.34,-7761.05 h130
  text "C" at 3637.34,-7777.05 h120
  text "GD1" at 5337.34,-7777.05 h120
  text "IN WRITING, ALL RIGHTS ARE RESERVED BY LAS CUMBRES OBSERVATORY." at -13347.66,-7816.05 h60

## Dimensions
3307.09,1358.27 to 0,1358.27 on Mechanical 2
3307.09,0 to 2913.39,0 on Mechanical 2
0,0 to 3307.09,1358.27 on Mechanical 2

## Text inside footprints (layer, text, board x,y; h text height)
J1: Bottom Overlay "PC07" at 2653.54,598.03 h60 r270; Bottom Overlay "PC01" at 600.39,639.76 h60 r270; Bottom Overlay "103" at 2373.54,618.03 h60 r270; Bottom Overlay "1" at 873.54,658.03 h60 r270